# Altium PCB PL2303.PcbDoc
Units mil, origin at the board's own origin, x right, y up, seen from the top; angles counter-clockwise.
Board outline 6000 x 4000 mil, 2 copper layers (Top Layer, Bottom Layer); 21 components, 17 nets, 80 pads, 4 vias.
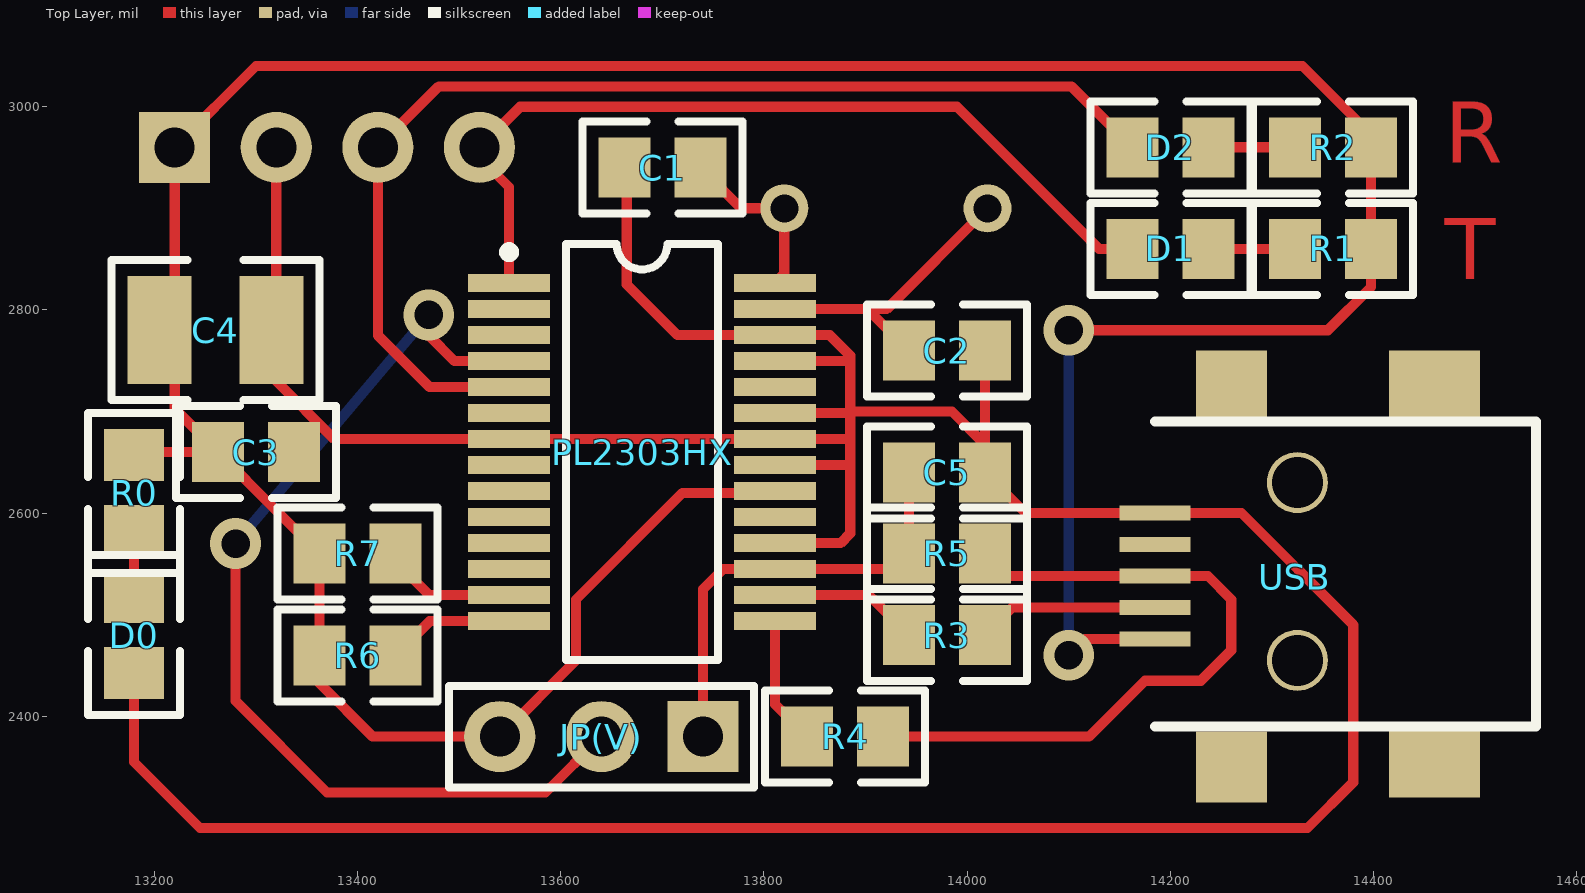
[diagram p0: Top Layer view]
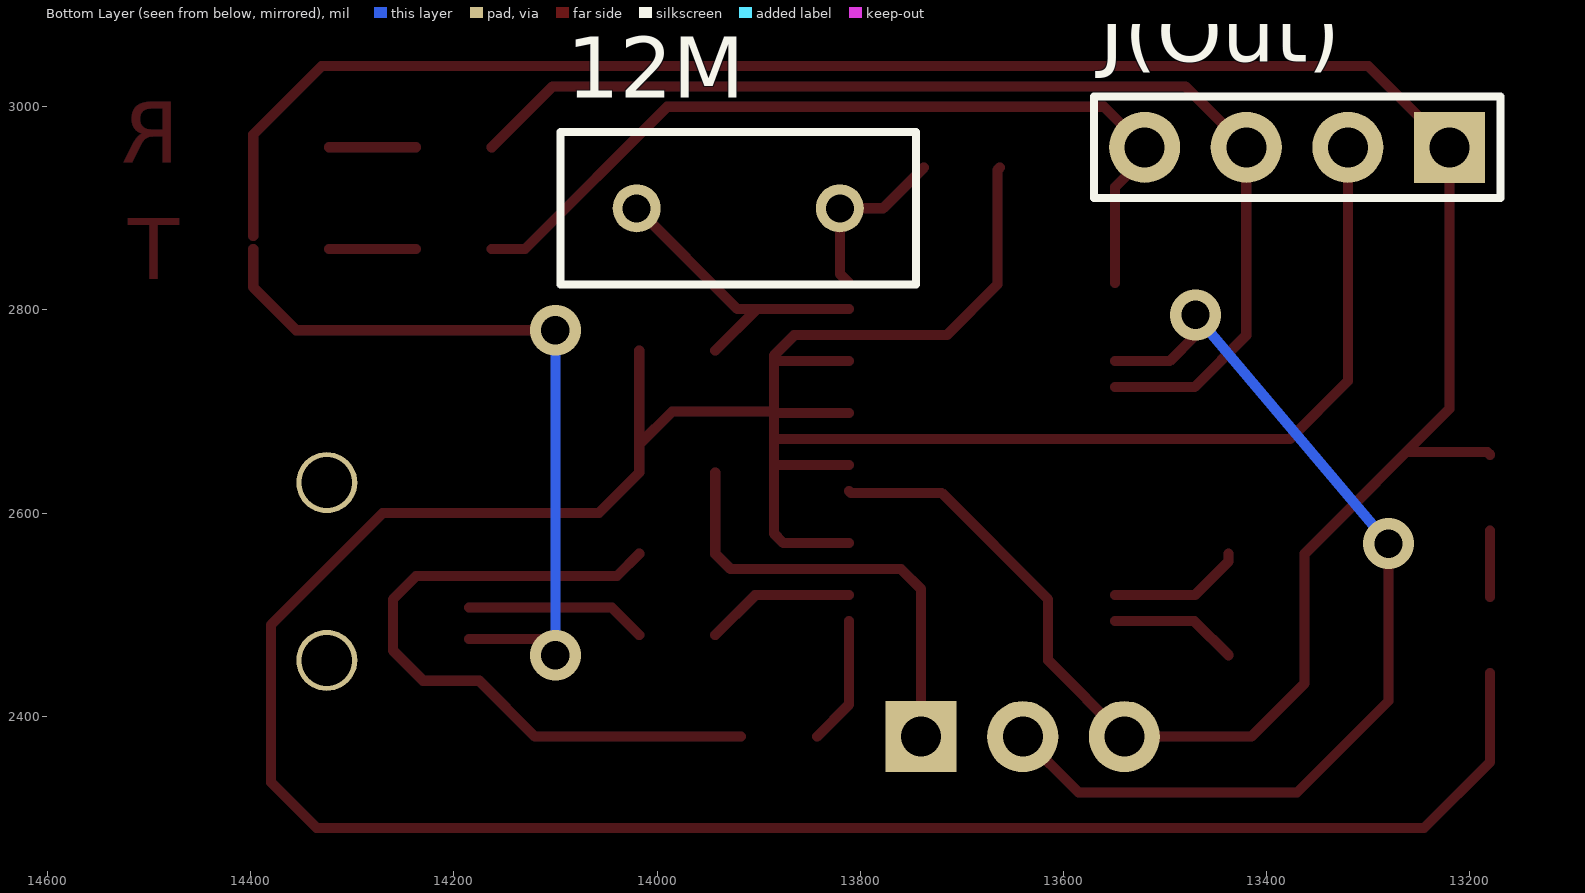
[diagram p1: Bottom Layer view, seen from below]

## Layer stack, top to bottom
Top Layer: signal copper 1.4
Dielectric: dielectric 12.6, FR-4, Dk 4.8
Bottom Layer: signal copper 1.4

## Board outline
1000,1000 7000,1000 7000,5000 1000,5000

## Design rules (kind name [scope] priority, off if disabled: settings)
Clearance [All] p1: gap=10
ComponentClearance [All] p1: gap=10 collisioncheckmode=0
PolygonConnect [All] p1: connectstyle=Relief reliefconductorwidth=10 reliefentries=4 polygonreliefangle="90 Angle"
RoomDefinition PL2303 [InComponentClass('PL2303')] p1: confinementstyle=ConfineIn formatcopy=TRUE outline 0,0 2000,0 2000,1000 0,1000
RoutingLayers [All] p1: top layer=Horizontal bottom layer=Vertical
RoutingVias [All] p1: holewidth=28 width=50 viastyle="Through Hole" minholewidth=28 minwidth=50 maxholewidth=28 maxwidth=50
SolderMaskExpansion [All] p1: expansion=4
TestPointUsage [All] p1: valid=0 allowmultiple=FALSE
Testpoint [All] p1: side=15 testpointundercomponent=TRUE minsize=40 maxsize=100 preferedsize=60 minholesize=0 maxholesize=40 preferedholesize=32 testpointgrid=1 style=1023 order=-539222988
Width [All] p1: maxlimit=10 minlimit=10 preferedwidth=10
16 further rules are at their usual default settings.

## Components (designator, comment, footprint, x,y, rotation, side; value= is the part's Value field where it differs from the comment)
12M "XTAL" RAD-0.2 13920,2900 r180 bottom
C1 "Cap" CR2012-0805 13700,2940 r180 top
C2 "Cap" CR2012-0805 13980,2760 r0 top
C3 "Cap" CR2012-0805 13300,2660 r180 top
C4 "Cap Pol2" CR3225-1210 13260,2780 r0 top
C5 "Cap" CR2012-0805 13980,2640 r180 top
D0 "LED2" R2012-0805 13180,2480 r270 top
D1 "LED2" R2012-0805 14200,2860 r180 top
D2 "LED2" R2012-0805 14200,2960 r180 top
J(Out) "Header 4" HDR1X4 13220,2960 r0 bottom
JP(V) "Header 3" HDR1X3 13740,2380 r180 top
PL2303HX "PL2303HX" SSOP28 13680,2660 r270 top
R0 "Res3" R2012-0805 13180,2620 r90 top
R1 "Res3" R2012-0805 14360,2860 r0 top
R2 "Res3" R2012-0805 14360,2960 r0 top
R3 "Res3" CR2012-0805 13980,2480 r0 top
R4 "Res3" CR2012-0805 13880,2380 r0 top
R5 "Res3" CR2012-0805 13980,2560 r0 top
R6 "Res3" CR2012-0805 13400,2460 r0 top
R7 "Res3" CR2012-0805 13400,2560 r0 top
USB "USB" mini_USB 14320,2540 r270 top

## Footprints (in the part's own frame and the unit in brackets; to place one, negate y for a bottom-side part, rotate by r counter-clockwise, add the part's x,y. Pads: shape width x height; smd on the part's side, far side on the other; paste and mask are expansions set on the pad)
CR2012-0805 [mm]
  rect 1.3x1.5 smd: 1(-0.95,0) 2(0.95,0)
  silkscreen extent -2,-1.15 2,1.15
CR3225-1210 [mm]
  rect 1.6x2.7 smd: 1(-1.4,0) 2(1.4,0)
  silkscreen extent -2.6,-1.75 2.6,1.75
HDR1X3 [mil] "Connector; Header; 3 Position"
  rect 70x70 hole 39.37: 1(0,0)
  round 70 hole 39.37: 2(100,0) 3(200,0)
  silkscreen extent -50,-50 250,50
HDR1X4 [mil] "Connector; Header; 4 Position"
  rect 70x70 hole 39.37: 1(0,0)
  round 70 hole 39.37: 2(100,0) 3(200,0) 4(300,0)
  silkscreen extent -50,-50 350,50
mini_USB [mil]
  rect 70x90 smd: 0(-185,140) 0(185,140)
  rect 70x70 smd: 0(-185,-60) 0(190,-60)
  round 60 hole 50: 0(-90,5) 0(85,5)
  rect 15x70 smd: 1(64,-135) 2(33,-135) 3(2,-135) 4(-60,-135) NC(-29,-135)
  silkscreen extent -150,-135 150,240
R2012-0805 [mm]
  rect 1.3x1.5 smd: 1(-0.95,0) 2(0.95,0)
  silkscreen extent -2,-1.15 2,1.15
RAD-0.2 [mm]
  round 1.2 hole 0.7: 1(-2.54,0) 2(2.54,0)
  silkscreen extent -4.44,-1.91 4.44,1.91
SSOP28 [mm] "SSOP; 28 Leads; Body Width 5.3 mm; Pitch 0.65 mm"
  rect 0.45x2.05 smd: 1(-4.225,-3.325) 2(-3.575,-3.325) 3(-2.925,-3.325) 4(-2.275,-3.325) 5(-1.625,-3.325) 6(-0.975,-3.325) 7(-0.325,-3.325) 8(0.325,-3.325) 9(0.975,-3.325) 10(1.625,-3.325) 11(2.275,-3.325) 12(2.925,-3.325) 13(3.575,-3.325) 14(4.225,-3.325) 15(4.225,3.325) 16(3.575,3.325) 17(2.925,3.325) 18(2.275,3.325) 19(1.625,3.325) 20(0.975,3.325) 21(0.325,3.325) 22(-0.325,3.325) 23(-0.975,3.325) 24(-1.625,3.325) 25(-2.275,3.325) 26(-2.925,3.325) 27(-3.575,3.325) 28(-4.225,3.325)
  silkscreen extent -5.2,-3.45 5.2,1.9

## Part data
12M: "Crystal Oscillator"
C1 C2 C3 C5: "Capacitor"
C4: "Polarized Capacitor (Axial)"
D0 D1 D2: "Typical RED, GREEN, YELLOW, AMBER GaAs LED"
J(Out): "Header, 4-Pin"
JP(V): "Header, 3-Pin"
PL2303HX: library part PL2303
R0 R1 R2 R3 R4 R5 R6 R7: "Resistor"

## Via types
v1: diameter 50, hole 28, Top Layer to Bottom Layer, 4 vias

## Nets (pads, with @x,y where several pads share a name; then routed paths per layer and width w, separated by ;. In a path a pad name is that pad's centre, name@x,y a point inside that pad or via, vN(x,y) a via of type N, cw(c..) or ccw(c..) an arc to the next point about the centre after c; other vN are vias at no path point)
GND: C1.2 C2.2 C3.1 C4.2 C5.1 D0.2 J(Out).2 PL2303HX.7 PL2303HX.18 PL2303HX.21 PL2303HX.22 PL2303HX.23 PL2303HX.25 PL2303HX.26 USB.4 | length 3840.4
  Top Layer w10: D0.2 13180,2355 13245,2290 14335,2290 14380,2335 14380,2490 14270,2600 14057.4,2600 C5.1 C2.2 ; 13320,2960 13320,2730 13377.2,2672.8 13882.2,2672.8 13885,2670 ; C1.2 13665,2937.6 13665,2825 13714.84,2775.16 13864.84,2775.16 13885,2755 ; PL2303HX.18 13875.43,2570.43 13885,2580 13885,2755 ; PL2303HX.21 13882.8,2647.2 13885,2645 ; PL2303HX.23 13883.39,2698.39 ; PL2303HX.25 13879.57,2749.57 13885,2755 ; 13885,2700 13985,2700 C5.1@14017.4,2667.6
Net12M_1: 12M.1 C2.1 PL2303HX.27 | length 307.8
  Top Layer w10: PL2303HX.27 13920.75,2800.75 12M.1 ; 13901.85,2800.75 C2.1
Net12M_2: 12M.2 C1.1 PL2303HX.28 | length 176.6
  Top Layer w10: C1.1 13777.4,2900 12M.2 13820,2835.43 PL2303HX.28
NetD0_1: D0.1 R0.1 | length 65.2
  Top Layer w10: D0.1 R0.1
NetD1_1: D1.1 R1.1 | length 85.2
  Top Layer w10: D1.1 R1.1
NetD1_2: D1.2 J(Out).4 PL2303HX.1 | length 862.9
  Top Layer w10: PL2303HX.1 13549.09,2920.91 13520,2950 13520,2960 13560,3000 13990,3000 14130,2860 D1.2
NetD2_1: D2.1 R2.1 | length 85.2
  Top Layer w10: D2.1 R2.1
NetD2_2: D2.2 J(Out).3 PL2303HX.5 | length 1127.5
  Top Layer w10: PL2303HX.5 13471.02,2723.98 13420,2775 13420,2960 13480,3020 14102.6,3020 D2.2
NetJP(V)_2: JP(V).2 PL2303HX.4 | length 979.2
  Top Layer w10: v1(13280,2570) 13280,2415 13370,2325 13585,2325 13640,2380 ; v1(13470,2795) 13470,2775 13495.43,2749.57 PL2303HX.4
  Bottom Layer w10: v1(13280,2570) v1(13470,2795)
NetPL2303HX_13: PL2303HX.13 R7.2 | length 132.9
  Top Layer w10: R7.2 13437.4,2552.6 13470.75,2519.25 PL2303HX.13
NetPL2303HX_14: PL2303HX.14 R6.2 | length 125.6
  Top Layer w10: R6.2 13471.06,2493.66 PL2303HX.14
NetPL2303HX_15: PL2303HX.15 R4.1 | length 126.8
  Top Layer w10: PL2303HX.15 13810.91,2411.69 R4.1
NetPL2303HX_16: PL2303HX.16 R3.1 | length 148
  Top Layer w10: PL2303HX.16 13903.35,2519.25 R3.1
NetR3_2: R3.2 USB.2 | length 178.8
  Top Layer w10: R3.2 14044.4,2507 USB.2
NetR4_2: R4.2 R5.2 USB.3 | length 689
  Top Layer w10: R4.2 14120,2380 14175,2435 14230,2435 14260,2465 14260,2515 14237,2538 14039.4,2538 R5.2
VDD: C3.2 C4.1 J(Out).1 JP(V).3 PL2303HX.20 R0.2 R1.2 R2.2 R6.1 R7.1 USB.1 | length 3378.2
  Top Layer w10: R0.2 13182.6,2660 C3.2 ; PL2303HX.20 13809.17,2619.88 13719.88,2619.88 13615,2515 13615,2455 13540,2380 13415,2380 13362.6,2432.4 R7.1 13220,2702.6 13220,2960 13300,3040 14330,3040 14397.4,2972.6 R1.2@14397.4,2872.6 ; v1(14100,2460) 14116,2476 USB.1 ; v1(14100,2780) 14355,2780 14397.4,2822.4 R1.2
  Bottom Layer w10: v1(14100,2460) v1(14100,2780)
VDD3.3: C5.2 JP(V).1 PL2303HX.17 R5.1 | length 442.2
  Top Layer w10: 13740,2380 13740,2525 13760,2545 13810.75,2545 PL2303HX.17 13927.44,2544.84 R5.1 C5.2
pads on no net: PL2303HX.2 PL2303HX.3 PL2303HX.6 PL2303HX.8 PL2303HX.9 PL2303HX.10 PL2303HX.11 PL2303HX.12 PL2303HX.19 PL2303HX.24 USB.0 USB.NC

## Other copper
Top Layer:
  text "R" at 14470,2945 h60
  text "T" at 14470,2830 h60